# Altium PCB layout.PcbDoc (part 9 of 11)
Units mil, origin at the board's own origin, x right, y up, seen from the top; angles counter-clockwise.
Board outline 3543.31 x 3149.61 mil, 2 copper layers (Top Layer, Bottom Layer); 78 components, 73 nets, 327 pads, 143 vias.
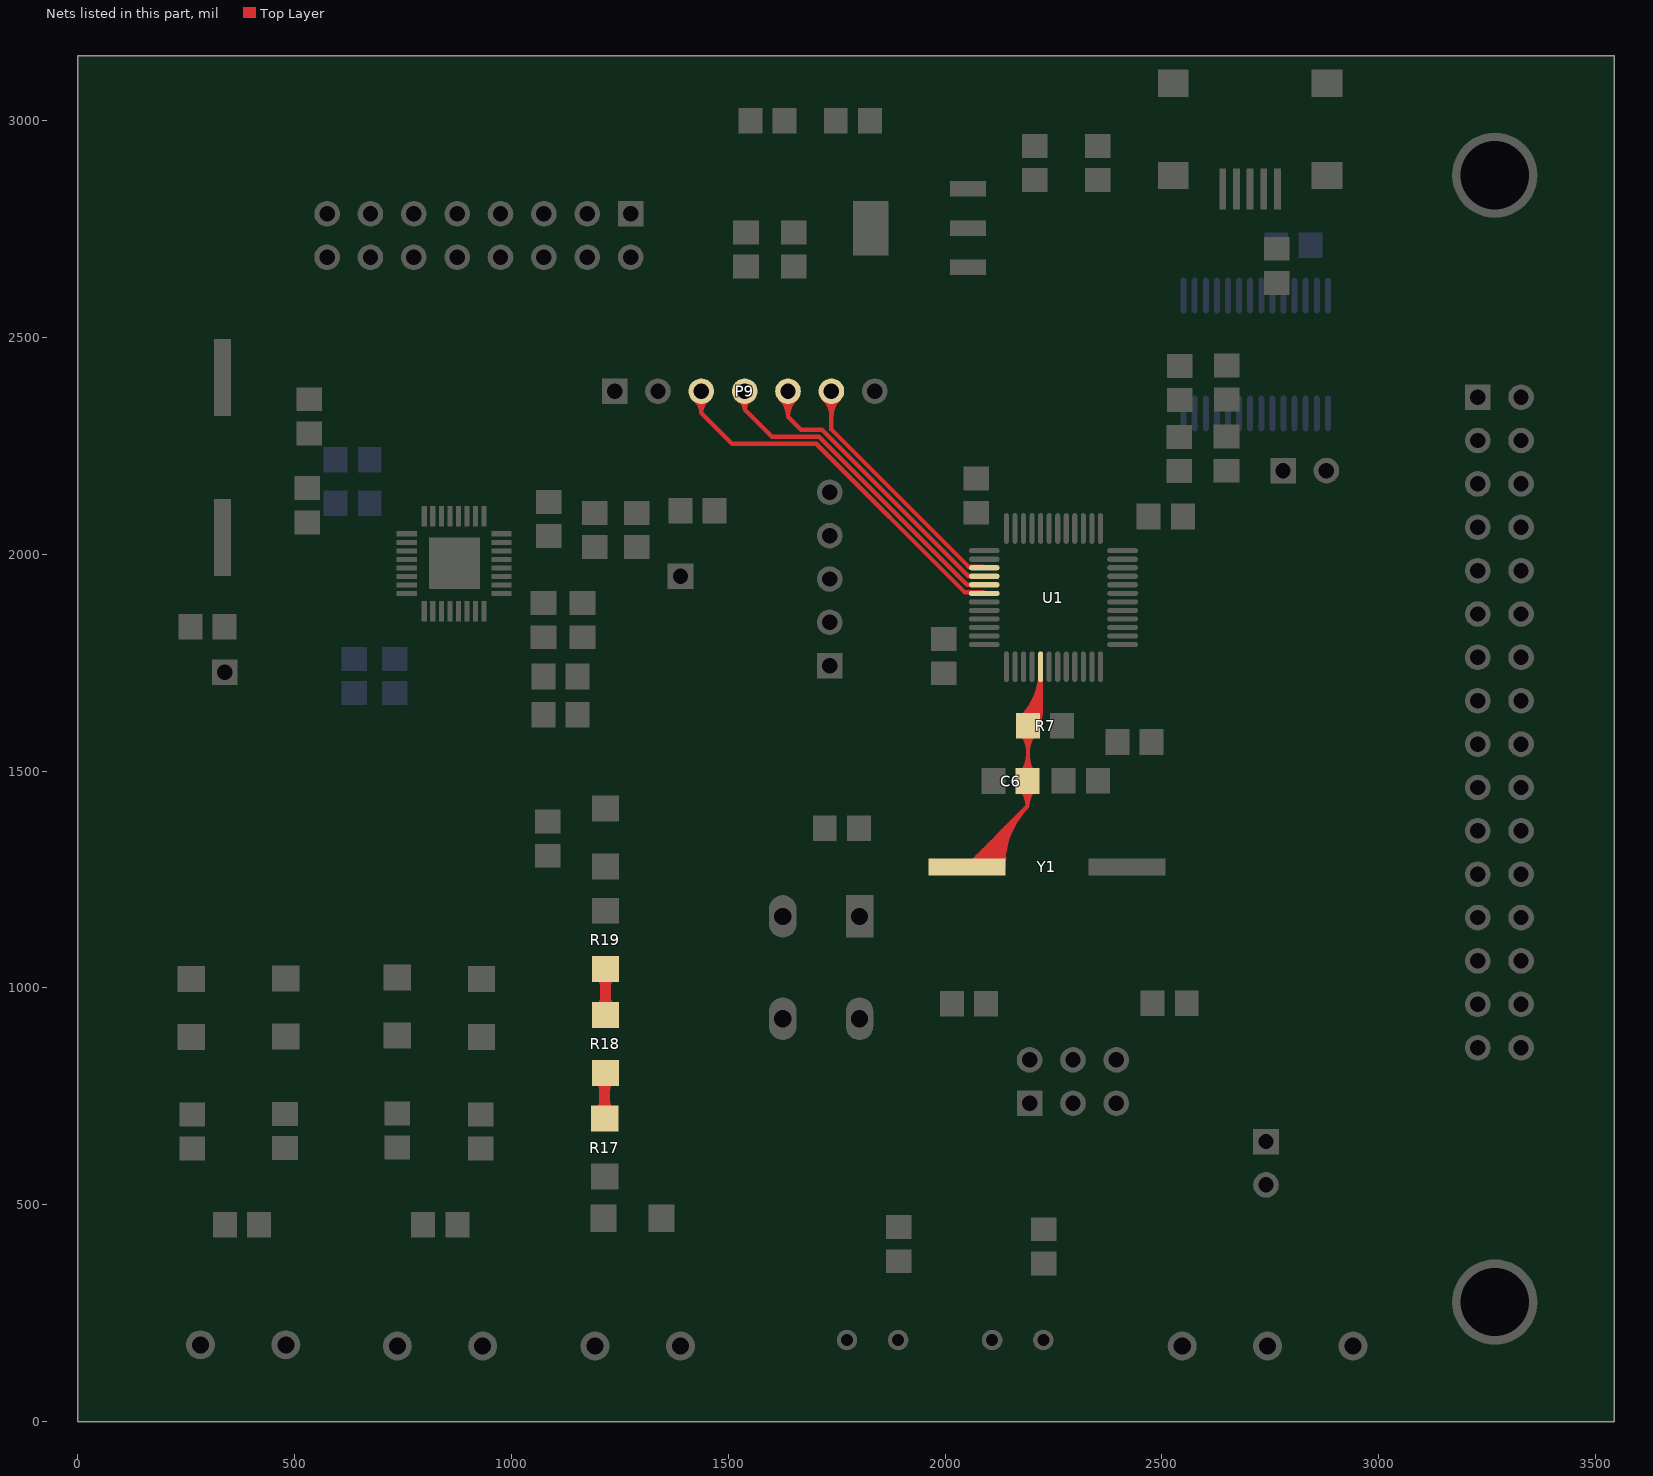
[diagram p9: the nets of this part, all layers, seen from the top]

## Via types
v1: diameter 35, hole 20, Top Layer to Bottom Layer, tented both sides, 113 vias
v2: diameter 35, hole 20, Top Layer to Bottom Layer, 28 vias
v3: diameter 35.43, hole 35.43, Top Layer to Bottom Layer, 2 vias

## Nets (pads, with @x,y where several pads share a name; then routed paths per layer and width w, separated by ;. In a path a pad name is that pad's centre, name@x,y a point inside that pad or via, vN(x,y) a via of type N, cw(c..) or ccw(c..) an arc to the next point about the centre after c; other vN are vias at no path point) (continued)
NetR17_2: R17.2 R18.1 | length 766.6
  Top Layer w25: R17.2@1215,698.86 1215,802 R18.1@1217,804 ; R17.2@1202.68,711.18 ccw(c1172.94,740.92) 1215,740.92 ; R17.2@1202.68,711.18 ccw(c1172.94,740.92) 1215,740.92 ; R17.2@1202.68,711.18 ccw(c1172.94,740.92) 1215,740.92 ; R17.2@1202.68,711.18 ccw(c1172.94,740.92) 1215,740.92 ; R17.2@1202.68,711.18 ccw(c1172.94,740.92) 1215,740.92 ; R18.1@1203.11,791.68 cw(c1174.39,762.97) 1215,762.97 ; R18.1@1203.11,791.68 cw(c1174.39,762.97) 1215,762.97 ; R18.1@1203.11,791.68 cw(c1174.39,762.97) 1215,762.97 ; R18.1@1203.11,791.68 cw(c1174.39,762.97) 1215,762.97 ; R18.1@1203.11,791.68 cw(c1174.39,762.97) 1215,762.97 ; 1215,740.92 ccw(c1257.06,740.92) R17.2@1227.32,711.18 ; 1215,740.92 ccw(c1257.06,740.92) R17.2@1227.32,711.18 ; 1215,740.92 ccw(c1257.06,740.92) R17.2@1227.32,711.18 ; 1215,740.92 ccw(c1257.06,740.92) R17.2@1227.32,711.18 ; 1215,740.92 ccw(c1257.06,740.92) R17.2@1227.32,711.18 ; 1215,760.91 cw(c1258.51,760.91) R18.1@1227.74,791.68 ; 1215,760.91 cw(c1258.51,760.91) R18.1@1227.74,791.68 ; 1215,760.91 cw(c1258.51,760.91) R18.1@1227.74,791.68 ; 1215,760.91 cw(c1258.51,760.91) R18.1@1227.74,791.68 ; 1215,760.91 cw(c1258.51,760.91) R18.1@1227.74,791.68
NetR18_2: R18.2 R19.1 | length 766.8
  Top Layer w25: R18.2@1217,937.86 R19.1@1217,1044 ; R18.2@1204.68,950.18 ccw(c1174.94,979.92) 1217,979.92 ; R18.2@1204.68,950.18 ccw(c1174.94,979.92) 1217,979.92 ; R18.2@1204.68,950.18 ccw(c1174.94,979.92) 1217,979.92 ; R18.2@1204.68,950.18 ccw(c1174.94,979.92) 1217,979.92 ; R18.2@1204.68,950.18 ccw(c1174.94,979.92) 1217,979.92 ; R19.1@1204.68,1031.68 cw(c1174.94,1001.94) 1217,1001.94 ; R19.1@1204.68,1031.68 cw(c1174.94,1001.94) 1217,1001.94 ; R19.1@1204.68,1031.68 cw(c1174.94,1001.94) 1217,1001.94 ; R19.1@1204.68,1031.68 cw(c1174.94,1001.94) 1217,1001.94 ; R19.1@1204.68,1031.68 cw(c1174.94,1001.94) 1217,1001.94 ; 1217,979.92 ccw(c1259.06,979.92) R18.2@1229.32,950.18 ; 1217,979.92 ccw(c1259.06,979.92) R18.2@1229.32,950.18 ; 1217,979.92 ccw(c1259.06,979.92) R18.2@1229.32,950.18 ; 1217,979.92 ccw(c1259.06,979.92) R18.2@1229.32,950.18 ; 1217,979.92 ccw(c1259.06,979.92) R18.2@1229.32,950.18 ; 1217,1001.94 cw(c1259.06,1001.94) R19.1@1229.32,1031.68 ; 1217,1001.94 cw(c1259.06,1001.94) R19.1@1229.32,1031.68 ; 1217,1001.94 cw(c1259.06,1001.94) R19.1@1229.32,1031.68 ; 1217,1001.94 cw(c1259.06,1001.94) R19.1@1229.32,1031.68 ; 1217,1001.94 cw(c1259.06,1001.94) R19.1@1229.32,1031.68
OLED_DC: P9.6 U1.39 | length 1435.7
  Top Layer w10: P9.6@1738,2376 1738,2287.7 2054.02,1971.68 ; U1.39@2090.55,1968.9 2087.77,1971.68 2054.02,1971.68 ; P9.6@1720.66,2358.66 cw(c1678.79,2316.79) 1738,2316.79 ; P9.6@1720.66,2358.66 cw(c1678.79,2316.79) 1738,2316.79 ; P9.6@1720.66,2358.66 cw(c1678.79,2316.79) 1738,2316.79 ; P9.6@1720.66,2358.66 cw(c1678.79,2316.79) 1738,2316.79 ; P9.6@1720.66,2358.66 cw(c1678.79,2316.79) 1738,2316.79 ; P9.6@1727.73,2365.73 cw(c1702.93,2340.93) 1738,2340.93 ; P9.6@1727.73,2365.73 cw(c1702.93,2340.93) 1738,2340.93 ; P9.6@1727.73,2365.73 cw(c1702.93,2340.93) 1738,2340.93 ; P9.6@1727.73,2365.73 cw(c1702.93,2340.93) 1738,2340.93 ; P9.6@1727.73,2365.73 cw(c1702.93,2340.93) 1738,2340.93 ; 1738,2316.79 cw(c1797.21,2316.79) P9.6@1755.34,2358.66 ; 1738,2316.79 cw(c1797.21,2316.79) P9.6@1755.34,2358.66 ; 1738,2316.79 cw(c1797.21,2316.79) P9.6@1755.34,2358.66 ; 1738,2316.79 cw(c1797.21,2316.79) P9.6@1755.34,2358.66 ; 1738,2316.79 cw(c1797.21,2316.79) P9.6@1755.34,2358.66 ; 1738,2340.93 cw(c1773.07,2340.93) P9.6@1748.27,2365.73 ; 1738,2340.93 cw(c1773.07,2340.93) P9.6@1748.27,2365.73 ; 1738,2340.93 cw(c1773.07,2340.93) P9.6@1748.27,2365.73 ; 1738,2340.93 cw(c1773.07,2340.93) P9.6@1748.27,2365.73 ; 1738,2340.93 cw(c1773.07,2340.93) P9.6@1748.27,2365.73 ; 2052.27,1973.43 ccw(c2061.02,1982.19) U1.39@2061.02,1969.8 ; 2052.27,1973.43 ccw(c2061.02,1982.19) U1.39@2061.02,1969.8 ; 2052.27,1973.43 ccw(c2061.02,1982.19) U1.39@2061.02,1969.8 ; 2052.27,1973.43 ccw(c2061.02,1982.19) U1.39@2061.02,1969.8 ; 2052.27,1973.43 ccw(c2061.02,1982.19) U1.39@2061.02,1969.8 ; 2054.02,1971.68 ccw(c2059.1,1976.76) U1.39@2060.81,1969.78 ; 2054.02,1971.68 cw(c2054.02,1964.09) U1.39@2060.28,1968.39 ; 2054.02,1971.68 ccw(c2059.1,1976.76) U1.39@2060.81,1969.78 ; 2054.02,1971.68 cw(c2054.02,1964.09) U1.39@2060.28,1968.39 ; 2054.02,1971.68 ccw(c2059.1,1976.76) U1.39@2060.81,1969.78 ; 2054.02,1971.68 cw(c2054.02,1964.09) U1.39@2060.28,1968.39 ; 2054.02,1971.68 ccw(c2059.1,1976.76) U1.39@2060.81,1969.78 ; 2054.02,1971.68 cw(c2054.02,1964.09) U1.39@2060.28,1968.39 ; 2054.02,1971.68 ccw(c2059.1,1976.76) U1.39@2060.81,1969.78 ; 2054.02,1971.68 cw(c2054.02,1964.09) U1.39@2060.28,1968.39
OLED_DIO: P9.4 U1.41 | length 1012.6
  Top Layer w10: P9.4@1538,2376 1538,2334 ; U1.41@2090.55,1929.53 2050.92,1929.53 1709.44,2271 1601,2271 1538,2334 ; P9.4@1525.95,2354.64 cw(c1514.31,2334) 1538,2334 ; P9.4@1525.95,2354.64 cw(c1514.31,2334) 1538,2334 ; P9.4@1525.95,2354.64 cw(c1514.31,2334) 1538,2334 ; P9.4@1525.95,2354.64 cw(c1514.31,2334) 1538,2334 ; P9.4@1525.95,2354.64 cw(c1514.31,2334) 1538,2334 ; 1538,2334 cw(c1561.69,2334) P9.4@1550.05,2354.64 ; 1538,2334 cw(c1561.69,2334) P9.4@1550.05,2354.64 ; 1538,2334 cw(c1561.69,2334) P9.4@1550.05,2354.64 ; 1538,2334 cw(c1561.69,2334) P9.4@1550.05,2354.64 ; 1538,2334 cw(c1561.69,2334) P9.4@1550.05,2354.64
OLED_RST: P9.5 U1.40 | length 1476.8
  Top Layer w10: P9.5@1638,2376 1638,2317 ; U1.40@2090.55,1949.21 2053.86,1949.21 1716.07,2287 1668,2287 1638,2317 ; P9.5@1620.7,2358.61 cw(c1579.31,2317) 1638,2317 ; P9.5@1620.7,2358.61 cw(c1579.31,2317) 1638,2317 ; P9.5@1620.7,2358.61 cw(c1579.31,2317) 1638,2317 ; P9.5@1620.7,2358.61 cw(c1579.31,2317) 1638,2317 ; P9.5@1620.7,2358.61 cw(c1579.31,2317) 1638,2317 ; P9.5@1627.75,2365.7 cw(c1603.24,2341.06) 1638,2341.06 ; P9.5@1627.75,2365.7 cw(c1603.24,2341.06) 1638,2341.06 ; P9.5@1627.75,2365.7 cw(c1603.24,2341.06) 1638,2341.06 ; P9.5@1627.75,2365.7 cw(c1603.24,2341.06) 1638,2341.06 ; P9.5@1627.75,2365.7 cw(c1603.24,2341.06) 1638,2341.06 ; 1638,2317 cw(c1696.69,2317) P9.5@1655.3,2358.61 ; 1638,2317 cw(c1696.69,2317) P9.5@1655.3,2358.61 ; 1638,2317 cw(c1696.69,2317) P9.5@1655.3,2358.61 ; 1638,2317 cw(c1696.69,2317) P9.5@1655.3,2358.61 ; 1638,2317 cw(c1696.69,2317) P9.5@1655.3,2358.61 ; 1638,2341.06 cw(c1672.76,2341.06) P9.5@1648.25,2365.7 ; 1638,2341.06 cw(c1672.76,2341.06) P9.5@1648.25,2365.7 ; 1638,2341.06 cw(c1672.76,2341.06) P9.5@1648.25,2365.7 ; 1638,2341.06 cw(c1672.76,2341.06) P9.5@1648.25,2365.7 ; 1638,2341.06 cw(c1672.76,2341.06) P9.5@1648.25,2365.7 ; 2047.25,1955.82 ccw(c2061.02,1969.6) U1.40@2061.02,1950.12 ; 2047.25,1955.82 ccw(c2061.02,1969.6) U1.40@2061.02,1950.12 ; 2047.25,1955.82 ccw(c2061.02,1969.6) U1.40@2061.02,1950.12 ; 2047.25,1955.82 ccw(c2061.02,1969.6) U1.40@2061.02,1950.12 ; 2047.25,1955.82 ccw(c2061.02,1969.6) U1.40@2061.02,1950.12
OLED_SCLK: P9.3 U1.42 | length 1482.8
  Top Layer w10: P9.3@1438,2376 1438,2326 ; U1.42@2090.55,1909.84 2087.77,1912.62 2045.19,1912.62 1702.82,2255 1509,2255 1438,2326 ; P9.3@1422.99,2356.6 cw(c1399.31,2326) 1438,2326 ; P9.3@1422.99,2356.6 cw(c1399.31,2326) 1438,2326 ; P9.3@1422.99,2356.6 cw(c1399.31,2326) 1438,2326 ; P9.3@1422.99,2356.6 cw(c1399.31,2326) 1438,2326 ; P9.3@1422.99,2356.6 cw(c1399.31,2326) 1438,2326 ; P9.3@1429.11,2364.51 cw(c1415.08,2346.39) 1438,2346.39 ; P9.3@1429.11,2364.51 cw(c1415.08,2346.39) 1438,2346.39 ; P9.3@1429.11,2364.51 cw(c1415.08,2346.39) 1438,2346.39 ; P9.3@1429.11,2364.51 cw(c1415.08,2346.39) 1438,2346.39 ; P9.3@1429.11,2364.51 cw(c1415.08,2346.39) 1438,2346.39 ; 1438,2326 cw(c1476.69,2326) P9.3@1453.01,2356.6 ; 1438,2326 cw(c1476.69,2326) P9.3@1453.01,2356.6 ; 1438,2326 cw(c1476.69,2326) P9.3@1453.01,2356.6 ; 1438,2326 cw(c1476.69,2326) P9.3@1453.01,2356.6 ; 1438,2326 cw(c1476.69,2326) P9.3@1453.01,2356.6 ; 1438,2346.39 cw(c1460.92,2346.39) P9.3@1446.89,2364.51 ; 1438,2346.39 cw(c1460.92,2346.39) P9.3@1446.89,2364.51 ; 1438,2346.39 cw(c1460.92,2346.39) P9.3@1446.89,2364.51 ; 1438,2346.39 cw(c1460.92,2346.39) P9.3@1446.89,2364.51 ; 1438,2346.39 cw(c1460.92,2346.39) P9.3@1446.89,2364.51 ; 2052.13,1912.62 cw(c2052.13,1900.94) U1.42@2060.38,1909.2 ; 2052.13,1912.62 cw(c2052.13,1900.94) U1.42@2060.38,1909.2 ; 2052.13,1912.62 cw(c2052.13,1900.94) U1.42@2060.38,1909.2 ; 2052.13,1912.62 cw(c2052.13,1900.94) U1.42@2060.38,1909.2 ; 2052.13,1912.62 cw(c2052.13,1900.94) U1.42@2060.38,1909.2
OSC_IN: C6.1 R7.2 U1.5 Y1.2 | length 14660.7
  Top Layer w10: Y1.2@2050.35,1279 2190.37,1419.02 ; U1.5@2220.47,1740.55 2220.47,1633.6 ; Y1.2@2052.53,1274.15 ccw(c2031.38,1321.36) 2081.58,1308.87 ; Y1.2@2052.53,1274.15 ccw(c2031.38,1321.36) 2081.58,1308.87 ; Y1.2@2052.53,1274.15 ccw(c2031.38,1321.36) 2081.58,1308.87 ; Y1.2@2052.53,1274.15 ccw(c2031.38,1321.36) 2081.58,1308.87 ; Y1.2@2052.53,1274.15 ccw(c2031.38,1321.36) 2081.58,1308.87 ; Y1.2@2052.53,1274.15 ccw(c2031.38,1321.36) 2081.58,1308.87 ; Y1.2@2052.53,1274.15 ccw(c2031.38,1321.36) 2081.58,1308.87 ; Y1.2@2052.53,1274.15 ccw(c2031.38,1321.36) 2081.58,1308.87 ; Y1.2@2052.53,1274.15 ccw(c2031.38,1321.36) 2081.58,1308.87 ; Y1.2@2052.53,1274.15 ccw(c2031.38,1321.36) 2081.58,1308.87 ; Y1.2@2053.95,1277.84 cw(c2064.95,1278.03) Y1.2@2057.17,1285.82 ; Y1.2@2053.95,1277.84 cw(c2064.95,1278.03) Y1.2@2057.17,1285.82 ; Y1.2@2053.95,1277.84 cw(c2064.95,1278.03) Y1.2@2057.17,1285.82 ; Y1.2@2053.95,1277.84 cw(c2064.95,1278.03) Y1.2@2057.17,1285.82 ; Y1.2@2053.95,1277.84 cw(c2064.95,1278.03) Y1.2@2057.17,1285.82 ; Y1.2@2056.61,1265.02 ccw(c2042.05,1297.53) Y1.2@2076.61,1288.92 ; Y1.2@2056.61,1265.02 ccw(c2042.05,1297.53) Y1.2@2076.61,1288.92 ; Y1.2@2056.61,1265.02 ccw(c2042.05,1297.53) Y1.2@2076.61,1288.92 ; Y1.2@2056.61,1265.02 ccw(c2042.05,1297.53) Y1.2@2076.61,1288.92 ; Y1.2@2056.61,1265.02 ccw(c2042.05,1297.53) Y1.2@2076.61,1288.92 ; Y1.2@2056.61,1265.02 ccw(c2042.05,1297.53) Y1.2@2076.61,1288.92 ; Y1.2@2056.61,1265.02 ccw(c2042.05,1297.53) Y1.2@2076.61,1288.92 ; Y1.2@2056.61,1265.02 ccw(c2042.05,1297.53) Y1.2@2076.61,1288.92 ; Y1.2@2056.61,1265.02 ccw(c2042.05,1297.53) Y1.2@2076.61,1288.92 ; Y1.2@2056.61,1265.02 ccw(c2042.05,1297.53) Y1.2@2076.61,1288.92 ; Y1.2@2063.95,1278.01 cw(c2097.67,1278.62) 2073.82,1302.47 ; Y1.2@2063.95,1278.01 cw(c2097.67,1278.62) 2073.82,1302.47 ; Y1.2@2063.95,1278.01 cw(c2097.67,1278.62) 2073.82,1302.47 ; Y1.2@2063.95,1278.01 cw(c2097.67,1278.62) 2073.82,1302.47 ; Y1.2@2063.95,1278.01 cw(c2097.67,1278.62) 2073.82,1302.47 ; Y1.2@2073.94,1278.19 cw(c2130.38,1279.2) 2090.47,1319.12 ; Y1.2@2073.94,1278.19 cw(c2130.38,1279.2) 2090.47,1319.12 ; Y1.2@2073.94,1278.19 cw(c2130.38,1279.2) 2090.47,1319.12 ; Y1.2@2073.94,1278.19 cw(c2130.38,1279.2) 2090.47,1319.12 ; Y1.2@2073.94,1278.19 cw(c2130.38,1279.2) 2090.47,1319.12 ; Y1.2@2083.94,1278.37 cw(c2163.1,1279.78) 2107.12,1335.76 ; Y1.2@2083.94,1278.37 cw(c2163.1,1279.78) 2107.12,1335.76 ; Y1.2@2083.94,1278.37 cw(c2163.1,1279.78) 2107.12,1335.76 ; Y1.2@2083.94,1278.37 cw(c2163.1,1279.78) 2107.12,1335.76 ; Y1.2@2083.94,1278.37 cw(c2163.1,1279.78) 2107.12,1335.76 ; Y1.2@2093.94,1278.55 cw(c2195.82,1280.37) 2123.77,1352.41 ; Y1.2@2093.94,1278.55 cw(c2195.82,1280.37) 2123.77,1352.41 ; Y1.2@2093.94,1278.55 cw(c2195.82,1280.37) 2123.77,1352.41 ; Y1.2@2093.94,1278.55 cw(c2195.82,1280.37) 2123.77,1352.41 ; Y1.2@2093.94,1278.55 cw(c2195.82,1280.37) 2123.77,1352.41 ; Y1.2@2103.94,1278.73 cw(c2228.53,1280.95) 2140.42,1369.06 ; Y1.2@2103.94,1278.73 cw(c2228.53,1280.95) 2140.42,1369.06 ; Y1.2@2103.94,1278.73 cw(c2228.53,1280.95) 2140.42,1369.06 ; Y1.2@2103.94,1278.73 cw(c2228.53,1280.95) 2140.42,1369.06 ; Y1.2@2103.94,1278.73 cw(c2228.53,1280.95) 2140.42,1369.06 ; Y1.2@2110.28,1290.63 ccw(c2078.97,1331.24) 2129.83,1324.66 ; Y1.2@2110.28,1290.63 ccw(c2078.97,1331.24) 2129.83,1324.66 ; Y1.2@2110.28,1290.63 ccw(c2078.97,1331.24) 2129.83,1324.66 ; Y1.2@2110.28,1290.63 ccw(c2078.97,1331.24) 2129.83,1324.66 ; Y1.2@2110.28,1290.63 ccw(c2078.97,1331.24) 2129.83,1324.66 ; Y1.2@2110.28,1290.63 ccw(c2078.97,1331.24) 2129.83,1324.66 ; Y1.2@2110.28,1290.63 ccw(c2078.97,1331.24) 2129.83,1324.66 ; Y1.2@2110.28,1290.63 ccw(c2078.97,1331.24) 2129.83,1324.66 ; Y1.2@2110.28,1290.63 ccw(c2078.97,1331.24) 2129.83,1324.66 ; Y1.2@2110.28,1290.63 ccw(c2078.97,1331.24) 2129.83,1324.66 ; Y1.2@2110.56,1290.84 ccw(c2100.16,1305) 2117.53,1302.34 ; Y1.2@2110.56,1290.84 ccw(c2100.16,1305) 2117.53,1302.34 ; Y1.2@2110.56,1290.84 ccw(c2100.16,1305) 2117.53,1302.34 ; Y1.2@2110.56,1290.84 ccw(c2100.16,1305) 2117.53,1302.34 ; Y1.2@2110.56,1290.84 ccw(c2100.16,1305) 2117.53,1302.34 ; Y1.2@2110.56,1290.84 ccw(c2100.16,1305) 2117.53,1302.34 ; Y1.2@2110.56,1290.84 ccw(c2100.16,1305) 2117.53,1302.34 ; Y1.2@2110.56,1290.84 ccw(c2100.16,1305) 2117.53,1302.34 ; Y1.2@2110.56,1290.84 ccw(c2100.16,1305) 2117.53,1302.34 ; Y1.2@2110.56,1290.84 ccw(c2100.16,1305) 2117.53,1302.34 ; Y1.2@2113.94,1278.91 cw(c2261.25,1281.53) 2157.07,1385.71 ; Y1.2@2113.94,1278.91 cw(c2261.25,1281.53) 2157.07,1385.71 ; Y1.2@2113.94,1278.91 cw(c2261.25,1281.53) 2157.07,1385.71 ; Y1.2@2113.94,1278.91 cw(c2261.25,1281.53) 2157.07,1385.71 ; Y1.2@2113.94,1278.91 cw(c2261.25,1281.53) 2157.07,1385.71 ; Y1.2@2116.33,1282.66 ccw(c2078.2,1330.32) 2138.86,1323.58 ; Y1.2@2116.33,1282.66 ccw(c2078.2,1330.32) 2138.86,1323.58 ; Y1.2@2116.33,1282.66 ccw(c2078.2,1330.32) 2138.86,1323.58 ; Y1.2@2116.33,1282.66 ccw(c2078.2,1330.32) 2138.86,1323.58 ; Y1.2@2116.33,1282.66 ccw(c2078.2,1330.32) 2138.86,1323.58 ; Y1.2@2116.33,1282.66 ccw(c2078.2,1330.32) 2138.86,1323.58 ; Y1.2@2116.33,1282.66 ccw(c2078.2,1330.32) 2138.86,1323.58 ; Y1.2@2116.33,1282.66 ccw(c2078.2,1330.32) 2138.86,1323.58 ; Y1.2@2116.33,1282.66 ccw(c2078.2,1330.32) 2138.86,1323.58 ; Y1.2@2116.33,1282.66 ccw(c2078.2,1330.32) 2138.86,1323.58 ; Y1.2@2116.39,1282.71 ccw(c2099.82,1304.2) 2126.73,1300.72 ; Y1.2@2116.39,1282.71 ccw(c2099.82,1304.2) 2126.73,1300.72 ; Y1.2@2116.39,1282.71 ccw(c2099.82,1304.2) 2126.73,1300.72 ; Y1.2@2116.39,1282.71 ccw(c2099.82,1304.2) 2126.73,1300.72 ; Y1.2@2116.39,1282.71 ccw(c2099.82,1304.2) 2126.73,1300.72 ; Y1.2@2116.39,1282.71 ccw(c2099.82,1304.2) 2126.73,1300.72 ; Y1.2@2116.39,1282.71 ccw(c2099.82,1304.2) 2126.73,1300.72 ; Y1.2@2116.39,1282.71 ccw(c2099.82,1304.2) 2126.73,1300.72 ; Y1.2@2116.39,1282.71 ccw(c2099.82,1304.2) 2126.73,1300.72 ; Y1.2@2116.39,1282.71 ccw(c2099.82,1304.2) 2126.73,1300.72 ; Y1.2@2117.04,1293.52 ccw(c2114.03,1313.29) 2130.14,1301.44 ; Y1.2@2117.04,1293.52 ccw(c2114.03,1313.29) 2130.14,1301.44 ; Y1.2@2117.04,1293.52 ccw(c2114.03,1313.29) 2130.14,1301.44 ; Y1.2@2117.04,1293.52 ccw(c2114.03,1313.29) 2130.14,1301.44 ; Y1.2@2117.04,1293.52 ccw(c2114.03,1313.29) 2130.14,1301.44 ; Y1.2@2117.04,1293.52 ccw(c2114.03,1313.29) 2130.14,1301.44 ; Y1.2@2117.04,1293.52 ccw(c2114.03,1313.29) 2130.14,1301.44 ; Y1.2@2117.04,1293.52 ccw(c2114.03,1313.29) 2130.14,1301.44 ; Y1.2@2117.04,1293.52 ccw(c2114.03,1313.29) 2130.14,1301.44 ; Y1.2@2117.04,1293.52 ccw(c2114.03,1313.29) 2130.14,1301.44 ; 2118.95,1311.63 ccw(c2140.01,1308.4) Y1.2@2127.72,1291 ; 2118.95,1311.63 ccw(c2140.01,1308.4) Y1.2@2127.72,1291 ; 2118.95,1311.63 ccw(c2140.01,1308.4) Y1.2@2127.72,1291 ; 2118.95,1311.63 ccw(c2140.01,1308.4) Y1.2@2127.72,1291 ; 2118.95,1311.63 ccw(c2140.01,1308.4) Y1.2@2127.72,1291 ; 2118.95,1311.63 ccw(c2140.01,1308.4) Y1.2@2127.72,1291 ; 2118.95,1311.63 ccw(c2140.01,1308.4) Y1.2@2127.72,1291 ; 2118.95,1311.63 ccw(c2140.01,1308.4) Y1.2@2127.72,1291 ; 2118.95,1311.63 ccw(c2140.01,1308.4) Y1.2@2127.72,1291 ; 2118.95,1311.63 ccw(c2140.01,1308.4) Y1.2@2127.72,1291 ; Y1.2@2122.57,1274.85 ccw(c2099.53,1303.66) 2136.19,1299.58 ; Y1.2@2122.57,1274.85 ccw(c2099.53,1303.66) 2136.19,1299.58 ; Y1.2@2122.57,1274.85 ccw(c2099.53,1303.66) 2136.19,1299.58 ; Y1.2@2122.57,1274.85 ccw(c2099.53,1303.66) 2136.19,1299.58 ; Y1.2@2122.57,1274.85 ccw(c2099.53,1303.66) 2136.19,1299.58 ; Y1.2@2122.57,1274.85 ccw(c2099.53,1303.66) 2136.19,1299.58 ; Y1.2@2122.57,1274.85 ccw(c2099.53,1303.66) 2136.19,1299.58 ; Y1.2@2122.57,1274.85 ccw(c2099.53,1303.66) 2136.19,1299.58 ; Y1.2@2122.57,1274.85 ccw(c2099.53,1303.66) 2136.19,1299.58 ; Y1.2@2122.57,1274.85 ccw(c2099.53,1303.66) 2136.19,1299.58 ; Y1.2@2123.94,1279.08 cw(c2293.96,1282.12) 2173.72,1402.36 ; Y1.2@2123.94,1279.08 cw(c2293.96,1282.12) 2173.72,1402.36 ; Y1.2@2123.94,1279.08 cw(c2293.96,1282.12) 2173.72,1402.36 ; Y1.2@2123.94,1279.08 cw(c2293.96,1282.12) 2173.72,1402.36 ; Y1.2@2123.94,1279.08 cw(c2293.96,1282.12) 2173.72,1402.36 ; 2126.96,1302.47 ccw(c2146.43,1299.95) Y1.2@2130.88,1287.97 ; 2126.96,1302.47 ccw(c2146.43,1299.95) Y1.2@2130.88,1287.97 ; 2126.96,1302.47 ccw(c2146.43,1299.95) Y1.2@2130.88,1287.97 ; 2126.96,1302.47 ccw(c2146.43,1299.95) Y1.2@2130.88,1287.97 ; 2126.96,1302.47 ccw(c2146.43,1299.95) Y1.2@2130.88,1287.97 ; 2126.96,1302.47 ccw(c2146.43,1299.95) Y1.2@2130.88,1287.97 ; 2126.96,1302.47 ccw(c2146.43,1299.95) Y1.2@2130.88,1287.97 ; 2126.96,1302.47 ccw(c2146.43,1299.95) Y1.2@2130.88,1287.97 ; 2126.96,1302.47 ccw(c2146.43,1299.95) Y1.2@2130.88,1287.97 ; 2126.96,1302.47 ccw(c2146.43,1299.95) Y1.2@2130.88,1287.97 ; Y1.2@2132.38,1285.57 cw(c2150.78,1294.78) 2134.21,1306.97 ; Y1.2@2132.38,1285.57 cw(c2150.78,1294.78) 2134.21,1306.97 ; Y1.2@2132.38,1285.57 cw(c2150.78,1294.78) 2134.21,1306.97 ; Y1.2@2132.38,1285.57 cw(c2150.78,1294.78) 2134.21,1306.97 ; Y1.2@2132.38,1285.57 cw(c2150.78,1294.78) 2134.21,1306.97 ; Y1.2@2132.38,1285.57 cw(c2150.78,1294.78) 2134.21,1306.97 ; Y1.2@2132.38,1285.57 cw(c2150.78,1294.78) 2134.21,1306.97 ; Y1.2@2132.38,1285.57 cw(c2150.78,1294.78) 2134.21,1306.97 ; Y1.2@2132.38,1285.57 cw(c2150.78,1294.78) 2134.21,1306.97 ; Y1.2@2132.38,1285.57 cw(c2150.78,1294.78) 2134.21,1306.97 ; Y1.2@2133.93,1279.26 cw(c2326.68,1282.7) 2190.37,1419.01 ; Y1.2@2133.93,1279.26 cw(c2326.68,1282.7) 2190.37,1419.01 ; Y1.2@2133.93,1279.26 cw(c2326.68,1282.7) 2190.37,1419.01 ; Y1.2@2133.93,1279.26 cw(c2326.68,1282.7) 2190.37,1419.01 ; Y1.2@2133.93,1279.26 cw(c2326.68,1282.7) 2190.37,1419.01 ; C6.1@2174.42,1459.08 cw(c2135.91,1420.57) 2190.37,1420.57 ; C6.1@2174.42,1459.08 cw(c2135.91,1420.57) 2190.37,1420.57 ; C6.1@2174.42,1459.08 cw(c2135.91,1420.57) 2190.37,1420.57 ; C6.1@2174.42,1459.08 cw(c2135.91,1420.57) 2190.37,1420.57 ; C6.1@2174.42,1459.08 cw(c2135.91,1420.57) 2190.37,1420.57 ; C6.1@2174.42,1494.92 ccw(c2133.64,1535.7) 2191.31,1535.7 ; C6.1@2174.42,1494.92 ccw(c2133.64,1535.7) 2191.31,1535.7 ; C6.1@2174.42,1494.92 ccw(c2133.64,1535.7) 2191.31,1535.7 ; C6.1@2174.42,1494.92 ccw(c2133.64,1535.7) 2191.31,1535.7 ; C6.1@2174.42,1494.92 ccw(c2133.64,1535.7) 2191.31,1535.7 ; R7.2@2175.36,1586.52 cw(c2136.85,1548.01) 2191.31,1548.01 ; R7.2@2175.36,1586.52 cw(c2136.85,1548.01) 2191.31,1548.01 ; R7.2@2175.36,1586.52 cw(c2136.85,1548.01) 2191.31,1548.01 ; R7.2@2175.36,1586.52 cw(c2136.85,1548.01) 2191.31,1548.01 ; R7.2@2175.36,1586.52 cw(c2136.85,1548.01) 2191.31,1548.01 ; R7.2@2175.36,1622.36 ccw(c2066.44,1731.28) U1.5@2220.47,1731.28 ; R7.2@2175.36,1622.36 ccw(c2066.44,1731.28) U1.5@2220.47,1731.28 ; R7.2@2175.36,1622.36 ccw(c2066.44,1731.28) U1.5@2220.47,1731.28 ; R7.2@2175.36,1622.36 ccw(c2066.44,1731.28) U1.5@2220.47,1731.28 ; R7.2@2175.36,1622.36 ccw(c2066.44,1731.28) U1.5@2220.47,1731.28 ; C6.1@2181.49,1466.15 cw(c2160.05,1444.71) 2190.37,1444.71 ; C6.1@2181.49,1466.15 cw(c2160.05,1444.71) 2190.37,1444.71 ; C6.1@2181.49,1466.15 cw(c2160.05,1444.71) 2190.37,1444.71 ; C6.1@2181.49,1466.15 cw(c2160.05,1444.71) 2190.37,1444.71 ; C6.1@2181.49,1466.15 cw(c2160.05,1444.71) 2190.37,1444.71 ; C6.1@2181.49,1487.85 ccw(c2157.79,1511.55) 2191.31,1511.55 ; C6.1@2181.49,1487.85 ccw(c2157.79,1511.55) 2191.31,1511.55 ; C6.1@2181.49,1487.85 ccw(c2157.79,1511.55) 2191.31,1511.55 ; C6.1@2181.49,1487.85 ccw(c2157.79,1511.55) 2191.31,1511.55 ; C6.1@2181.49,1487.85 ccw(c2157.79,1511.55) 2191.31,1511.55 ; R7.2@2182.43,1593.59 cw(c2160.99,1572.15) 2191.31,1572.15 ; R7.2@2182.43,1593.59 cw(c2160.99,1572.15) 2191.31,1572.15 ; R7.2@2182.43,1593.59 cw(c2160.99,1572.15) 2191.31,1572.15 ; R7.2@2182.43,1593.59 cw(c2160.99,1572.15) 2191.31,1572.15 ; R7.2@2182.43,1593.59 cw(c2160.99,1572.15) 2191.31,1572.15 ; R7.2@2182.43,1615.29 ccw(c2090.58,1707.14) U1.5@2220.47,1707.14 ; R7.2@2182.43,1615.29 ccw(c2090.58,1707.14) U1.5@2220.47,1707.14 ; R7.2@2182.43,1615.29 ccw(c2090.58,1707.14) U1.5@2220.47,1707.14 ; R7.2@2182.43,1615.29 ccw(c2090.58,1707.14) U1.5@2220.47,1707.14 ; R7.2@2182.43,1615.29 ccw(c2090.58,1707.14) U1.5@2220.47,1707.14 ; R7.2@2185.47,1628.2 ccw(c2173.56,1672.65) 2213.41,1649.64 ; R7.2@2185.47,1628.2 ccw(c2173.56,1672.65) 2213.41,1649.64 ; R7.2@2185.47,1628.2 ccw(c2173.56,1672.65) 2213.41,1649.64 ; R7.2@2185.47,1628.2 ccw(c2173.56,1672.65) 2213.41,1649.64 ; R7.2@2185.47,1628.2 ccw(c2173.56,1672.65) 2213.41,1649.64 ; R7.2@2185.47,1628.2 ccw(c2173.56,1672.65) 2213.41,1649.64 ; R7.2@2185.47,1628.2 ccw(c2173.56,1672.65) 2213.41,1649.64 ; R7.2@2185.47,1628.2 ccw(c2173.56,1672.65) 2213.41,1649.64 ; R7.2@2185.47,1628.2 ccw(c2173.56,1672.65) 2213.41,1649.64 ; R7.2@2185.47,1628.2 ccw(c2173.56,1672.65) 2213.41,1649.64 ; R7.2@2186.6,1628.47 ccw(c2183.98,1640.72) R7.2@2194.49,1633.91 ; R7.2@2186.6,1628.47 ccw(c2183.98,1640.72) R7.2@2194.49,1633.91 ; R7.2@2186.6,1628.47 ccw(c2183.98,1640.72) R7.2@2194.49,1633.91 ; R7.2@2186.6,1628.47 ccw(c2183.98,1640.72) R7.2@2194.49,1633.91 ; R7.2@2186.6,1628.47 ccw(c2183.98,1640.72) R7.2@2194.49,1633.91 ; R7.2@2186.6,1628.47 ccw(c2183.98,1640.72) R7.2@2194.49,1633.91 ; R7.2@2186.6,1628.47 ccw(c2183.98,1640.72) R7.2@2194.49,1633.91 ; R7.2@2186.6,1628.47 ccw(c2183.98,1640.72) R7.2@2194.49,1633.91 ; R7.2@2186.6,1628.47 ccw(c2183.98,1640.72) R7.2@2194.49,1633.91 ; R7.2@2186.6,1628.47 ccw(c2183.98,1640.72) R7.2@2194.49,1633.91 ; R7.2@2189.5,1608.22 ccw(c2114.72,1682.99) 2220.47,1682.99 ; R7.2@2189.5,1608.22 ccw(c2114.72,1682.99) 2220.47,1682.99 ; R7.2@2189.5,1608.22 ccw(c2114.72,1682.99) 2220.47,1682.99 ; R7.2@2189.5,1608.22 ccw(c2114.72,1682.99) 2220.47,1682.99 ; R7.2@2189.5,1608.22 ccw(c2114.72,1682.99) 2220.47,1682.99 ; 2190.37,1419.02 C6.1@2190.37,1477 2191.31,1477.94 R7.2@2191.31,1604.44 2220.47,1633.6 ; 2190.37,1420.57 cw(c2244.83,1420.57) C6.1@2206.32,1459.08 ; 2190.37,1420.57 cw(c2244.83,1420.57) C6.1@2206.32,1459.08 ; 2190.37,1420.57 cw(c2244.83,1420.57) C6.1@2206.32,1459.08 ; 2190.37,1420.57 cw(c2244.83,1420.57) C6.1@2206.32,1459.08 ; 2190.37,1420.57 cw(c2244.83,1420.57) C6.1@2206.32,1459.08 ; 2190.37,1444.71 cw(c2220.69,1444.71) C6.1@2199.25,1466.15 ; 2190.37,1444.71 cw(c2220.69,1444.71) C6.1@2199.25,1466.15 ; 2190.37,1444.71 cw(c2220.69,1444.71) C6.1@2199.25,1466.15 ; 2190.37,1444.71 cw(c2220.69,1444.71) C6.1@2199.25,1466.15 ; 2190.37,1444.71 cw(c2220.69,1444.71) C6.1@2199.25,1466.15 ; 2191.31,1507.02 ccw(c2218.43,1507.02) C6.1@2199.25,1487.85 ; 2191.31,1507.02 ccw(c2218.43,1507.02) C6.1@2199.25,1487.85 ; 2191.31,1507.02 ccw(c2218.43,1507.02) C6.1@2199.25,1487.85 ; 2191.31,1507.02 ccw(c2218.43,1507.02) C6.1@2199.25,1487.85 ; 2191.31,1507.02 ccw(c2218.43,1507.02) C6.1@2199.25,1487.85 ; 2191.31,1531.17 ccw(c2242.57,1531.17) C6.1@2206.32,1494.92 ; 2191.31,1531.17 ccw(c2242.57,1531.17) C6.1@2206.32,1494.92 ; 2191.31,1531.17 ccw(c2242.57,1531.17) C6.1@2206.32,1494.92 ; 2191.31,1531.17 ccw(c2242.57,1531.17) C6.1@2206.32,1494.92 ; 2191.31,1531.17 ccw(c2242.57,1531.17) C6.1@2206.32,1494.92 ; 2191.31,1548.01 cw(c2245.77,1548.01) R7.2@2207.26,1586.52 ; 2191.31,1548.01 cw(c2245.77,1548.01) R7.2@2207.26,1586.52 ; 2191.31,1548.01 cw(c2245.77,1548.01) R7.2@2207.26,1586.52 ; 2191.31,1548.01 cw(c2245.77,1548.01) R7.2@2207.26,1586.52 ; 2191.31,1548.01 cw(c2245.77,1548.01) R7.2@2207.26,1586.52 ; 2191.31,1572.15 cw(c2221.63,1572.15) R7.2@2200.19,1593.59 ; 2191.31,1572.15 cw(c2221.63,1572.15) R7.2@2200.19,1593.59 ; 2191.31,1572.15 cw(c2221.63,1572.15) R7.2@2200.19,1593.59 ; 2191.31,1572.15 cw(c2221.63,1572.15) R7.2@2200.19,1593.59 ; 2191.31,1572.15 cw(c2221.63,1572.15) R7.2@2200.19,1593.59 ; R7.2@2192.96,1618.86 ccw(c2195.51,1638.07) R7.2@2212.29,1628.38 ; R7.2@2192.96,1618.86 ccw(c2195.51,1638.07) R7.2@2212.29,1628.38 ; R7.2@2192.96,1618.86 ccw(c2195.51,1638.07) R7.2@2212.29,1628.38 ; R7.2@2192.96,1618.86 ccw(c2195.51,1638.07) R7.2@2212.29,1628.38 ; R7.2@2192.96,1618.86 ccw(c2195.51,1638.07) R7.2@2212.29,1628.38 ; R7.2@2192.96,1618.86 ccw(c2195.51,1638.07) R7.2@2212.29,1628.38 ; R7.2@2192.96,1618.86 ccw(c2195.51,1638.07) R7.2@2212.29,1628.38 ; R7.2@2192.96,1618.86 ccw(c2195.51,1638.07) R7.2@2212.29,1628.38 ; R7.2@2192.96,1618.86 ccw(c2195.51,1638.07) R7.2@2212.29,1628.38 ; R7.2@2192.96,1618.86 ccw(c2195.51,1638.07) R7.2@2212.29,1628.38 ; R7.2@2194.28,1628.77 ccw(c2197.64,1654.1) 2219.77,1641.32 ; R7.2@2194.28,1628.77 ccw(c2197.64,1654.1) 2219.77,1641.32 ; R7.2@2194.28,1628.77 ccw(c2197.64,1654.1) 2219.77,1641.32 ; R7.2@2194.28,1628.77 ccw(c2197.64,1654.1) 2219.77,1641.32 ; R7.2@2194.28,1628.77 ccw(c2197.64,1654.1) 2219.77,1641.32 ; R7.2@2194.28,1628.77 ccw(c2197.64,1654.1) 2219.77,1641.32 ; R7.2@2194.28,1628.77 ccw(c2197.64,1654.1) 2219.77,1641.32 ; R7.2@2194.28,1628.77 ccw(c2197.64,1654.1) 2219.77,1641.32 ; R7.2@2194.28,1628.77 ccw(c2197.64,1654.1) 2219.77,1641.32 ; R7.2@2194.28,1628.77 ccw(c2197.64,1654.1) 2219.77,1641.32 ; R7.2@2196.57,1601.15 ccw(c2138.86,1658.85) 2220.47,1658.85 ; R7.2@2196.57,1601.15 ccw(c2138.86,1658.85) 2220.47,1658.85 ; R7.2@2196.57,1601.15 ccw(c2138.86,1658.85) 2220.47,1658.85 ; R7.2@2196.57,1601.15 ccw(c2138.86,1658.85) 2220.47,1658.85 ; R7.2@2196.57,1601.15 ccw(c2138.86,1658.85) 2220.47,1658.85 ; R7.2@2196.71,1601.29 ccw(c2160.06,1635.99) 2210.36,1640.18 ; R7.2@2196.71,1601.29 ccw(c2160.06,1635.99) 2210.36,1640.18 ; R7.2@2196.71,1601.29 ccw(c2160.06,1635.99) 2210.36,1640.18 ; R7.2@2196.71,1601.29 ccw(c2160.06,1635.99) 2210.36,1640.18 ; R7.2@2196.71,1601.29 ccw(c2160.06,1635.99) 2210.36,1640.18 ; R7.2@2196.71,1601.29 ccw(c2160.06,1635.99) 2210.36,1640.18 ; R7.2@2196.71,1601.29 ccw(c2160.06,1635.99) 2210.36,1640.18 ; R7.2@2196.71,1601.29 ccw(c2160.06,1635.99) 2210.36,1640.18 ; R7.2@2196.71,1601.29 ccw(c2160.06,1635.99) 2210.36,1640.18 ; R7.2@2196.71,1601.29 ccw(c2160.06,1635.99) 2210.36,1640.18 ; R7.2@2197.91,1627.98 ccw(c2204.51,1649.56) 2220.47,1633.6 ; R7.2@2197.91,1627.98 ccw(c2204.51,1649.56) 2220.47,1633.6 ; R7.2@2197.91,1627.98 ccw(c2204.51,1649.56) 2220.47,1633.6 ; R7.2@2197.91,1627.98 ccw(c2204.51,1649.56) 2220.47,1633.6 ; R7.2@2197.91,1627.98 ccw(c2204.51,1649.56) 2220.47,1633.6 ; 2200.92,1643.83 ccw(c2223.48,1629.22) R7.2@2201.55,1613.67 ; 2200.92,1643.83 ccw(c2223.48,1629.22) R7.2@2201.55,1613.67 ; 2200.92,1643.83 ccw(c2223.48,1629.22) R7.2@2201.55,1613.67 ; 2200.92,1643.83 ccw(c2223.48,1629.22) R7.2@2201.55,1613.67 ; 2200.92,1643.83 ccw(c2223.48,1629.22) R7.2@2201.55,1613.67 ; 2200.92,1643.83 ccw(c2223.48,1629.22) R7.2@2201.55,1613.67 ; 2200.92,1643.83 ccw(c2223.48,1629.22) R7.2@2201.55,1613.67 ; 2200.92,1643.83 ccw(c2223.48,1629.22) R7.2@2201.55,1613.67 ; 2200.92,1643.83 ccw(c2223.48,1629.22) R7.2@2201.55,1613.67 ; 2200.92,1643.83 ccw(c2223.48,1629.22) R7.2@2201.55,1613.67 ; R7.2@2203.13,1610.65 cw(c2231.26,1620.76) 2205.37,1635.71 ; R7.2@2203.13,1610.65 cw(c2231.26,1620.76) 2205.37,1635.71 ; R7.2@2203.13,1610.65 cw(c2231.26,1620.76) 2205.37,1635.71 ; R7.2@2203.13,1610.65 cw(c2231.26,1620.76) 2205.37,1635.71 ; R7.2@2203.13,1610.65 cw(c2231.26,1620.76) 2205.37,1635.71 ; R7.2@2203.13,1610.65 cw(c2231.26,1620.76) 2205.37,1635.71 ; R7.2@2203.13,1610.65 cw(c2231.26,1620.76) 2205.37,1635.71 ; R7.2@2203.13,1610.65 cw(c2231.26,1620.76) 2205.37,1635.71 ; R7.2@2203.13,1610.65 cw(c2231.26,1620.76) 2205.37,1635.71 ; R7.2@2203.13,1610.65 cw(c2231.26,1620.76) 2205.37,1635.71 ; R7.2@2203.64,1594.08 ccw(c2163.01,1634.71) 2220.47,1634.71 ; R7.2@2203.64,1594.08 ccw(c2163.01,1634.71) 2220.47,1634.71 ; R7.2@2203.64,1594.08 ccw(c2163.01,1634.71) 2220.47,1634.71 ; R7.2@2203.64,1594.08 ccw(c2163.01,1634.71) 2220.47,1634.71 ; R7.2@2203.64,1594.08 ccw(c2163.01,1634.71) 2220.47,1634.71 ; 2208.94,1656.21 ccw(c2236.43,1638.4) R7.2@2209.71,1619.46 ; 2208.94,1656.21 ccw(c2236.43,1638.4) R7.2@2209.71,1619.46 ; 2208.94,1656.21 ccw(c2236.43,1638.4) R7.2@2209.71,1619.46 ; 2208.94,1656.21 ccw(c2236.43,1638.4) R7.2@2209.71,1619.46 ; 2208.94,1656.21 ccw(c2236.43,1638.4) R7.2@2209.71,1619.46 ; 2208.94,1656.21 ccw(c2236.43,1638.4) R7.2@2209.71,1619.46 ; 2208.94,1656.21 ccw(c2236.43,1638.4) R7.2@2209.71,1619.46 ; 2208.94,1656.21 ccw(c2236.43,1638.4) R7.2@2209.71,1619.46 ; 2208.94,1656.21 ccw(c2236.43,1638.4) R7.2@2209.71,1619.46 ; 2208.94,1656.21 ccw(c2236.43,1638.4) R7.2@2209.71,1619.46 ; R7.2@2212.54,1614.04 cw(c2257.85,1630.31) 2216.15,1654.39 ; R7.2@2212.54,1614.04 cw(c2257.85,1630.31) 2216.15,1654.39 ; R7.2@2212.54,1614.04 cw(c2257.85,1630.31) 2216.15,1654.39 ; R7.2@2212.54,1614.04 cw(c2257.85,1630.31) 2216.15,1654.39 ; R7.2@2212.54,1614.04 cw(c2257.85,1630.31) 2216.15,1654.39 ; R7.2@2212.54,1614.04 cw(c2257.85,1630.31) 2216.15,1654.39 ; R7.2@2212.54,1614.04 cw(c2257.85,1630.31) 2216.15,1654.39 ; R7.2@2212.54,1614.04 cw(c2257.85,1630.31) 2216.15,1654.39 ; R7.2@2212.54,1614.04 cw(c2257.85,1630.31) 2216.15,1654.39 ; R7.2@2212.54,1614.04 cw(c2257.85,1630.31) 2216.15,1654.39 ; R7.2@2213.1,1612.25 cw(c2242,1619.99) 2216.09,1634.95 ; R7.2@2213.1,1612.25 cw(c2242,1619.99) 2216.09,1634.95 ; R7.2@2213.1,1612.25 cw(c2242,1619.99) 2216.09,1634.95 ; R7.2@2213.1,1612.25 cw(c2242,1619.99) 2216.09,1634.95 ; R7.2@2213.1,1612.25 cw(c2242,1619.99) 2216.09,1634.95 ; R7.2@2213.1,1612.25 cw(c2242,1619.99) 2216.09,1634.95 ; R7.2@2213.1,1612.25 cw(c2242,1619.99) 2216.09,1634.95 ; R7.2@2213.1,1612.25 cw(c2242,1619.99) 2216.09,1634.95 ; R7.2@2213.1,1612.25 cw(c2242,1619.99) 2216.09,1634.95 ; R7.2@2213.1,1612.25 cw(c2242,1619.99) 2216.09,1634.95 ; R7.2@2213.46,1610.69 cw(c2238.53,1615.55) 2220.47,1633.6 ; R7.2@2213.46,1610.69 cw(c2238.53,1615.55) 2220.47,1633.6 ; R7.2@2213.46,1610.69 cw(c2238.53,1615.55) 2220.47,1633.6 ; R7.2@2213.46,1610.69 cw(c2238.53,1615.55) 2220.47,1633.6 ; R7.2@2213.46,1610.69 cw(c2238.53,1615.55) 2220.47,1633.6